# Altium PCB VirtualWire.PcbDoc
Units mm, origin at the board's own origin, x right, y up, seen from the top; angles counter-clockwise.
Board outline 100.6 x 100 mm, 4 copper layers (Top Layer, Int1 (GND), Int2 (Signal), Bottom Layer), stack 1.369 mm thick; 35 components, 65 nets, 299 pads, 84 vias.
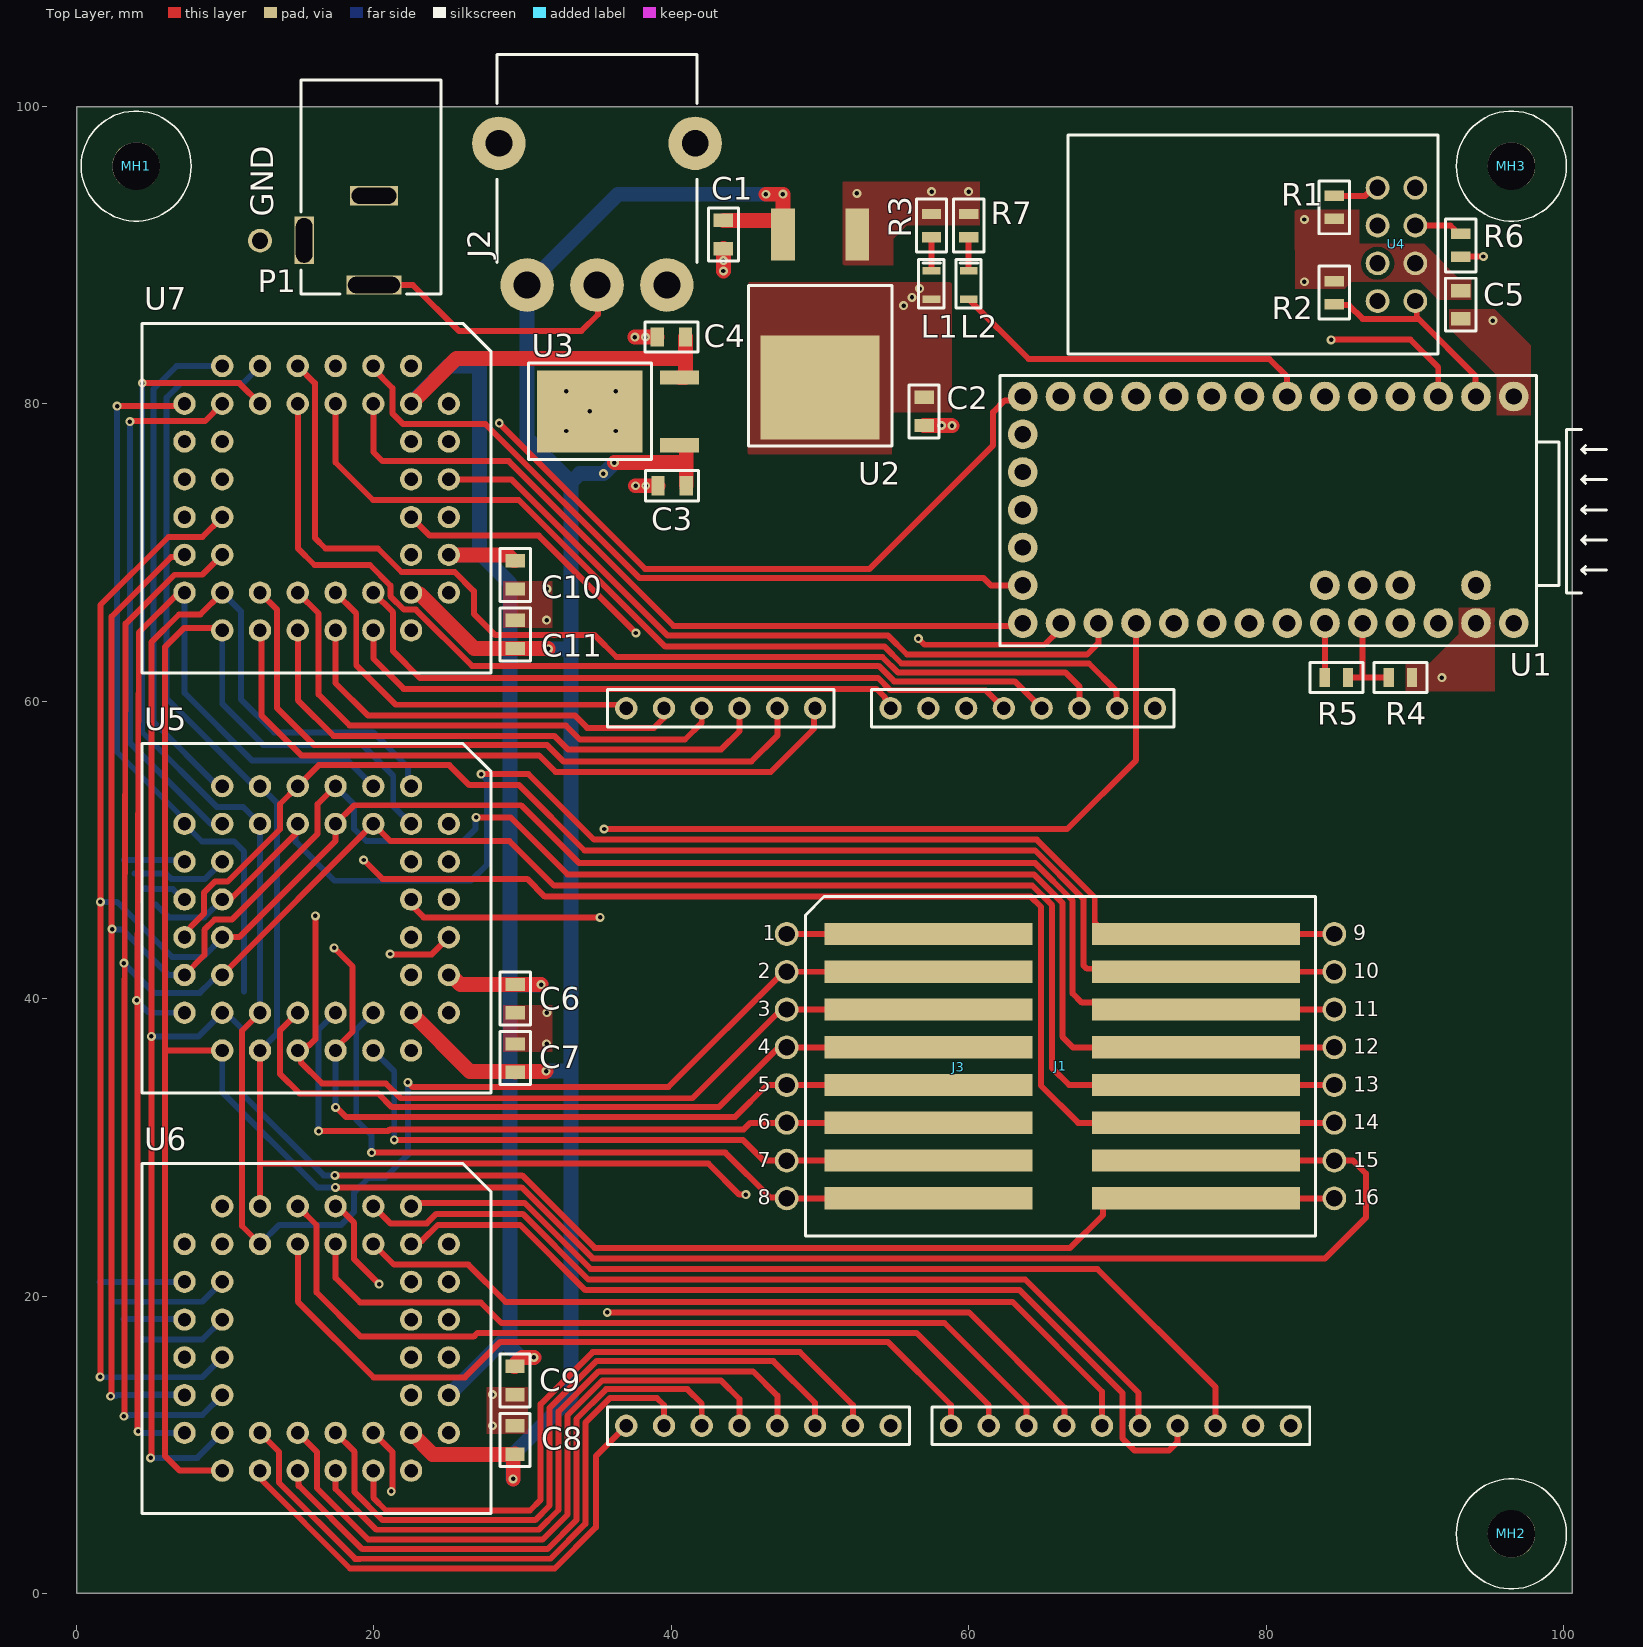
[diagram p0: Top Layer view]
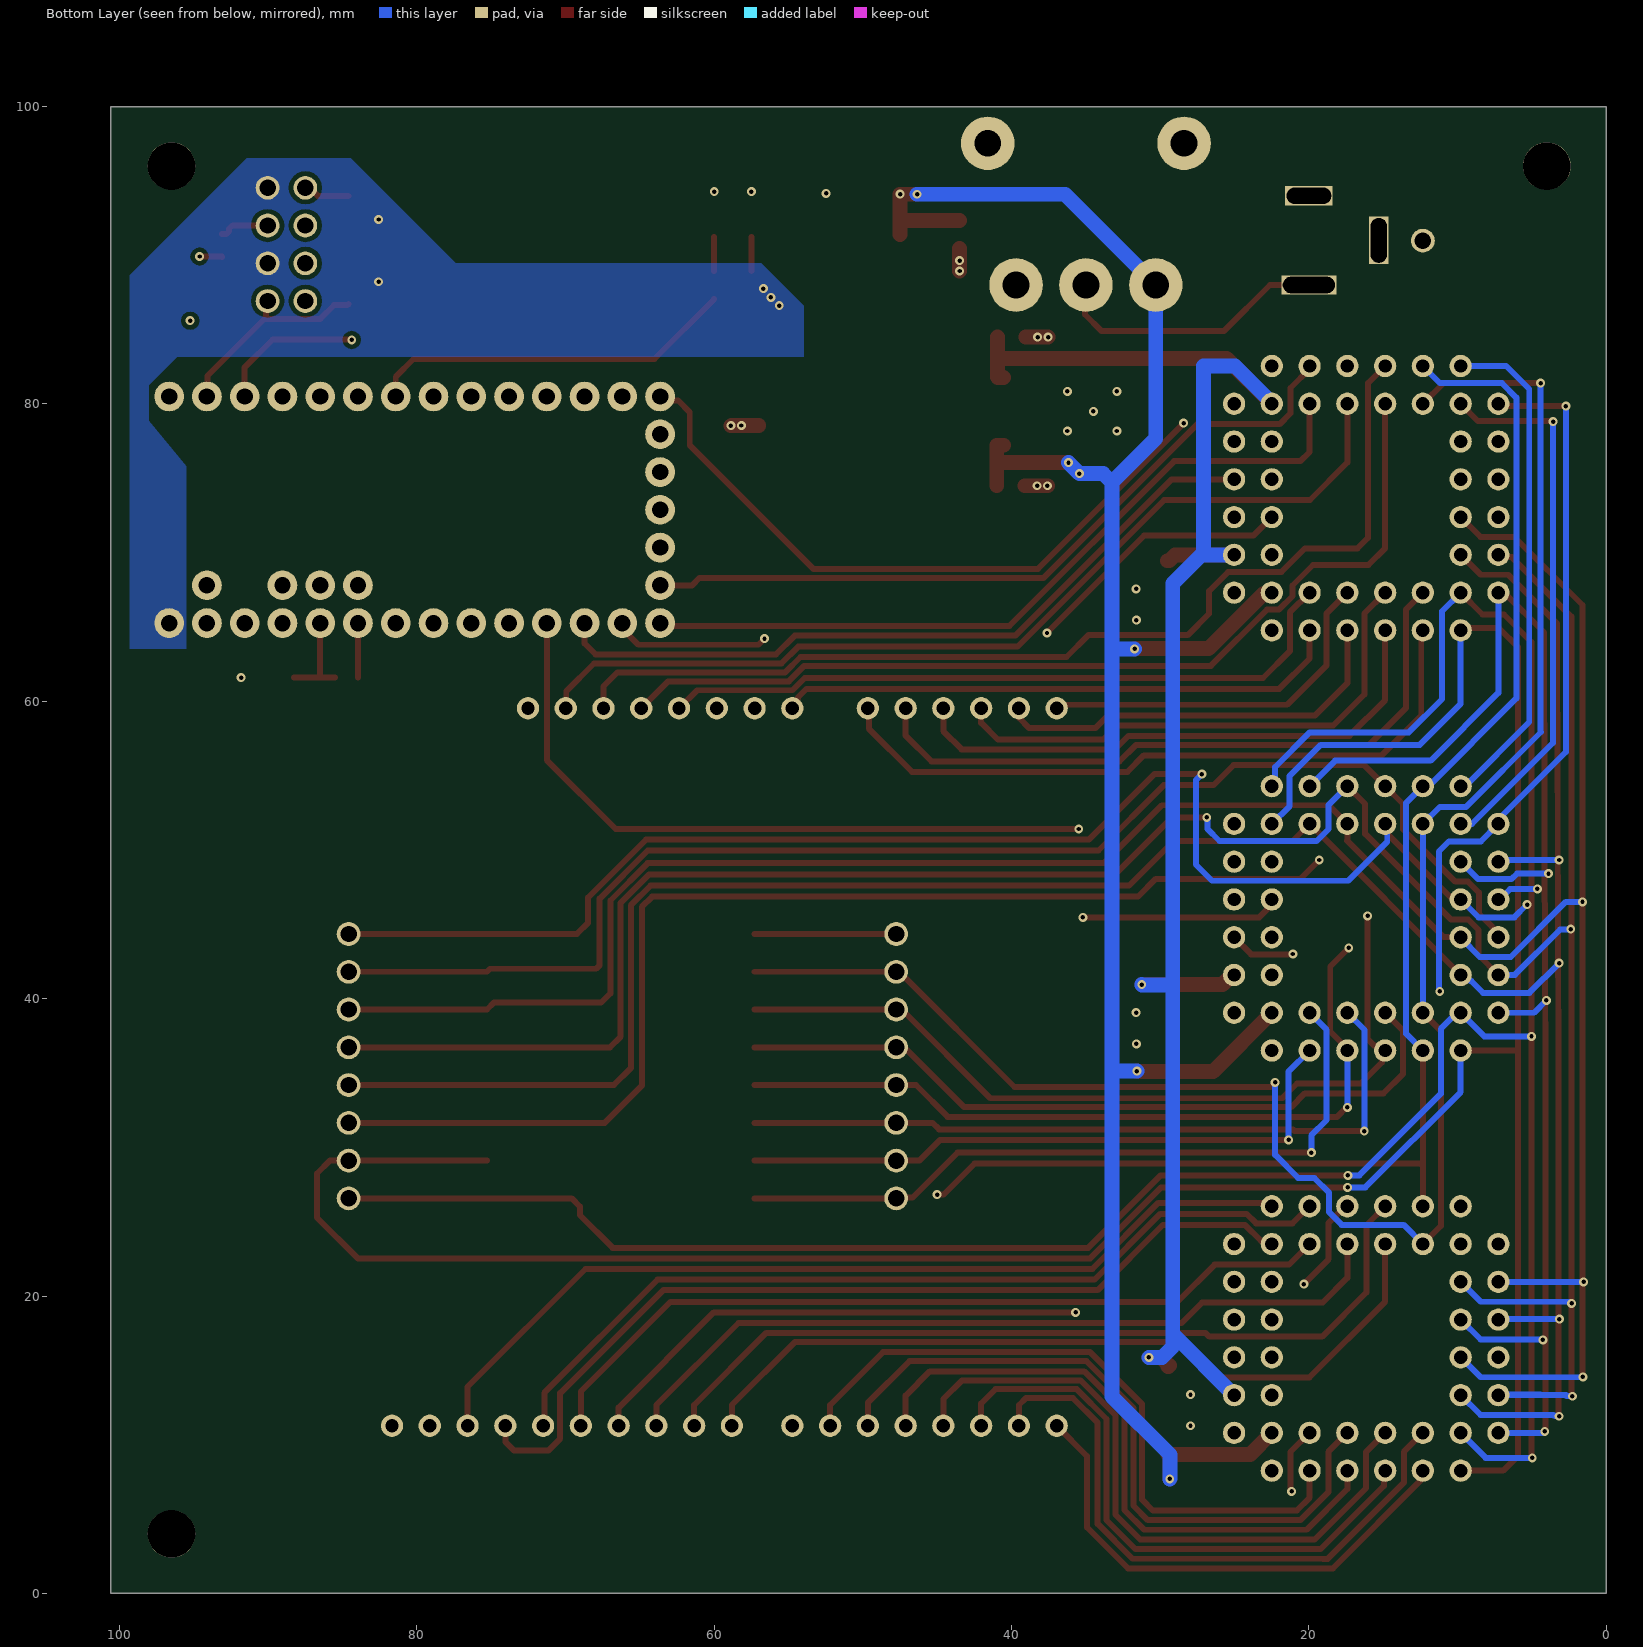
[diagram p1: Bottom Layer view, seen from below]
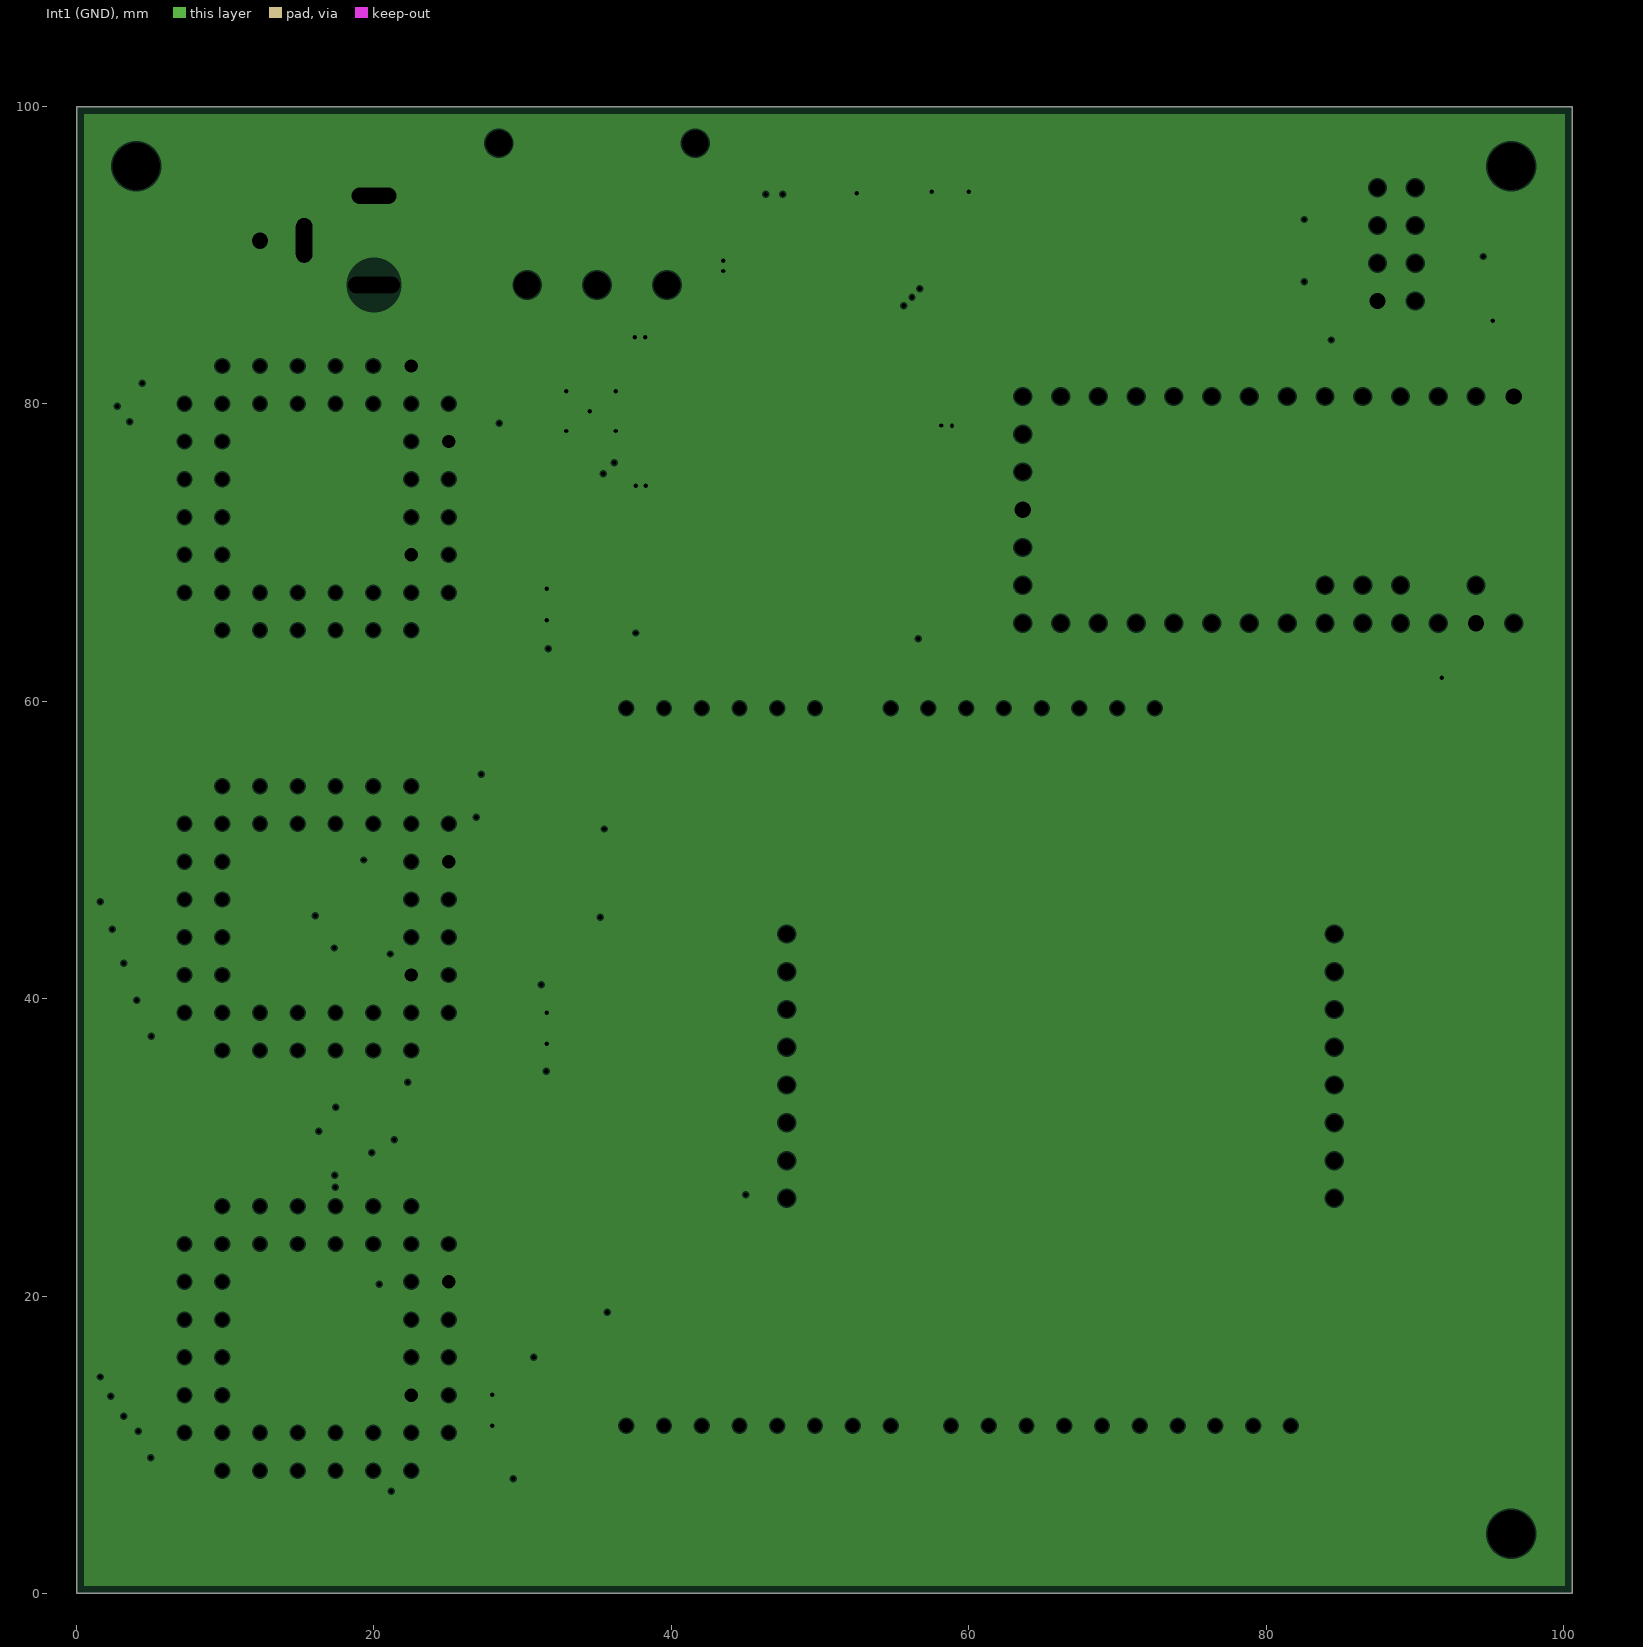
[diagram p2: Int1 (GND), clearances drawn from the general rule]
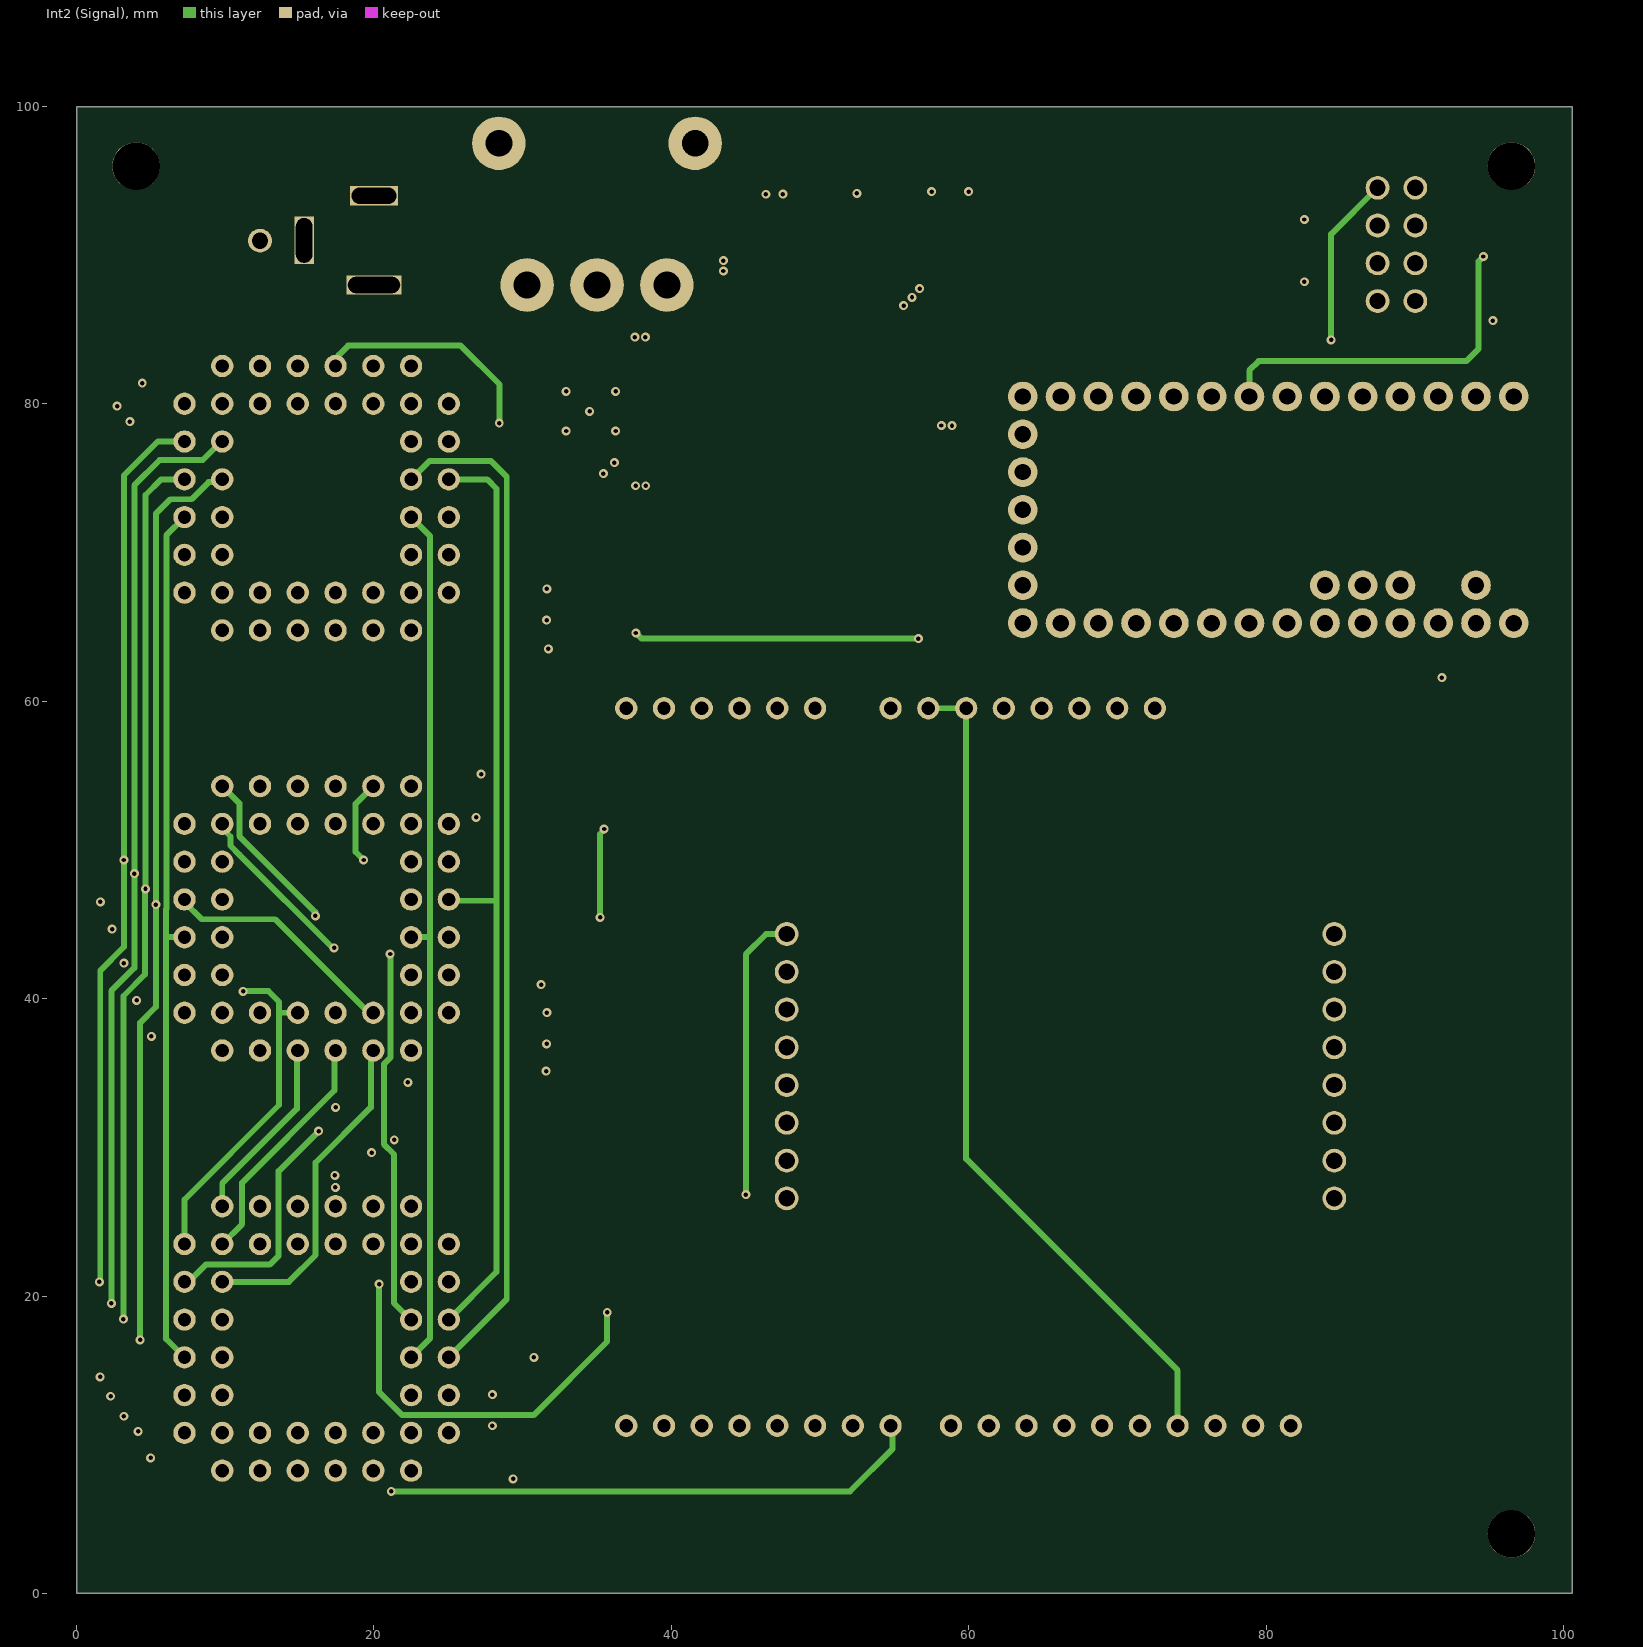
[diagram p3: Int2 (Signal)]
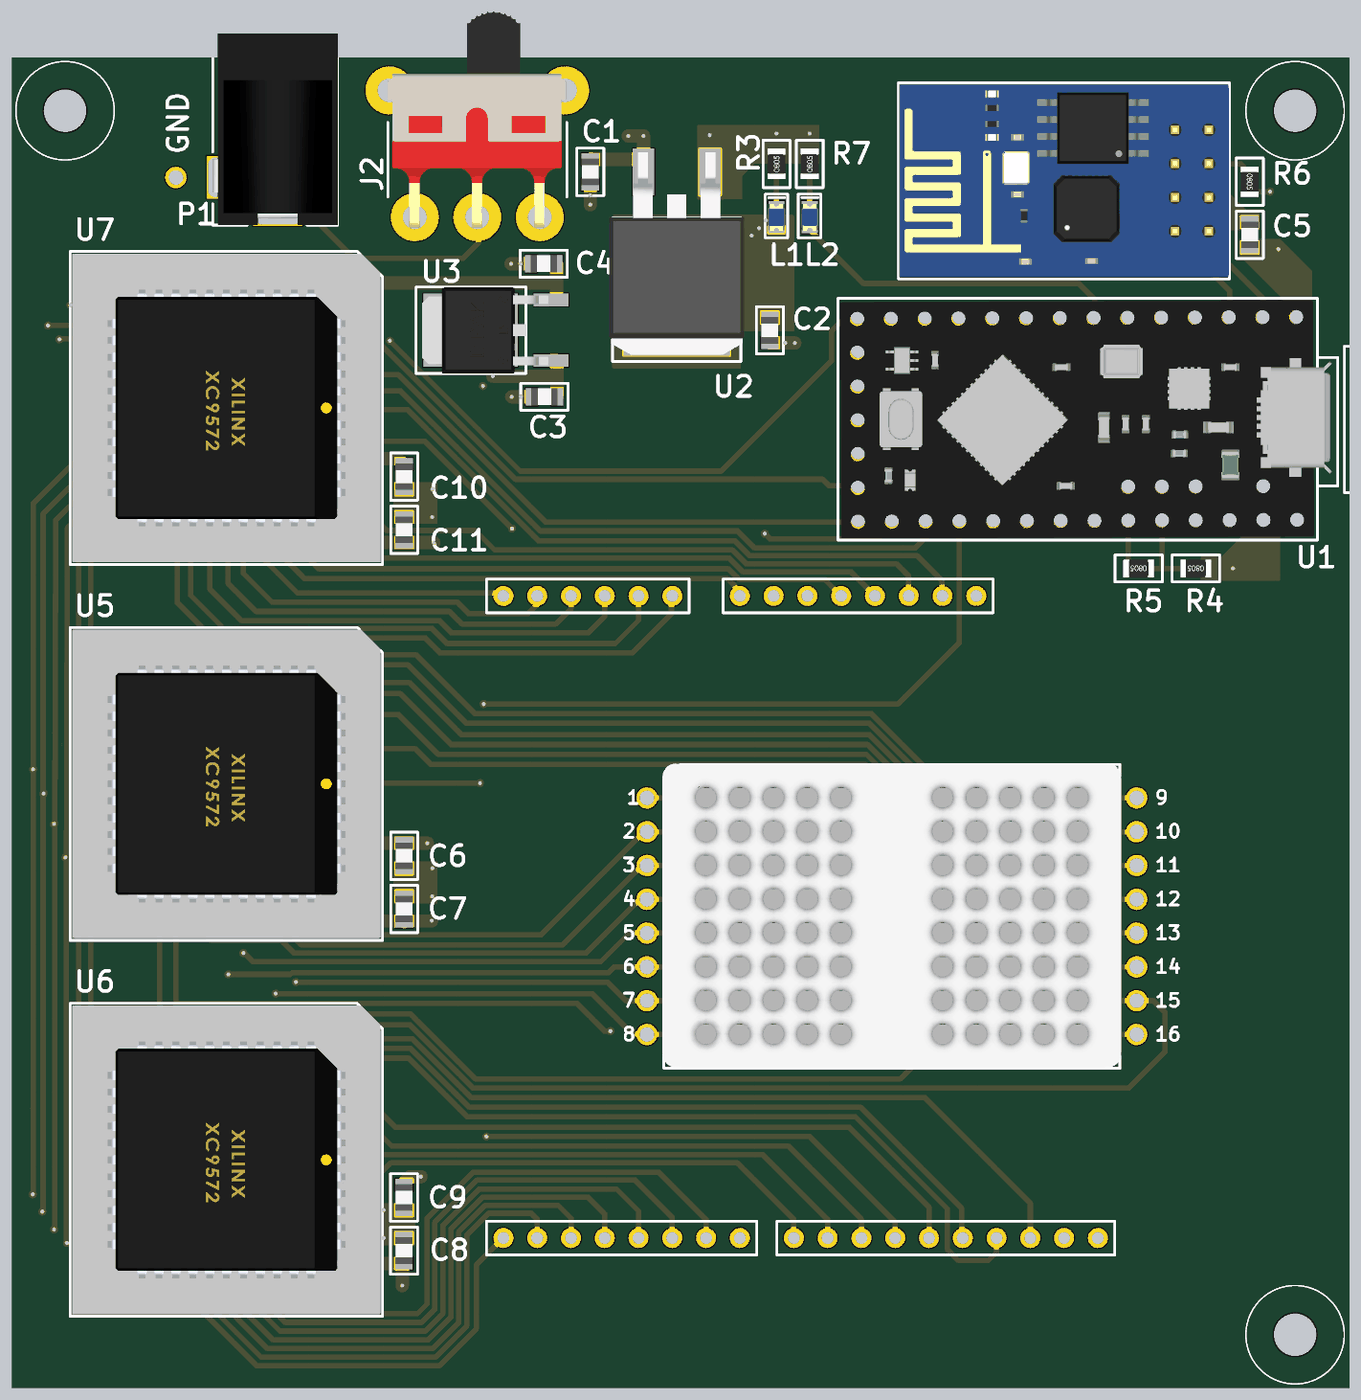
[diagram p4: 3D render of the assembled board from above, using the file's embedded part models]

## Layer stack, top to bottom
Top Solder: solder mask 0.0254, SM-001, Dk 4
Top Layer: signal copper 0.035
Dielectric 1: prepreg 0.1295, PP-017, Dk 4.3
Dielectric 2: prepreg 0.1295, PP-017, Dk 4.3
Int1 (GND): plane copper 0.035, net GND
Dielectric 3: core 0.7112, Core-039, Dk 4.8
Int2 (Signal): signal copper 0.035
Dielectric 4: prepreg 0.1295, PP-017, Dk 4.3
Dielectric 5: prepreg 0.1295, PP-017, Dk 4.3
Bottom Layer: signal copper 0.035
Bottom Solder: solder mask 0.0254, SM-001, Dk 4

## Board outline
0,0 100.6,0 100.6,100 0,100

## Design rules (kind name [scope] priority, off if disabled: settings)
Clearance "Around polygon" [IsRegion] p1: gap=0.3 ignorepadtopadclearanceinfootprint=FALSE
Clearance [All] p2: gap=0.2 ignorepadtopadclearanceinfootprint=FALSE
ComponentClearance J3_R4/5 [InComponent('J3') vs InComponent('R4') OR InComponent('R5')] p1: gap=0 collisioncheckmode=3 verticalgap=0 showdistances=FALSE
ComponentClearance J1_J3 [InComponent('J1') vs InComponent('J3')] p2: gap=0 collisioncheckmode=3 verticalgap=0 showdistances=FALSE
ComponentClearance [All] p3: gap=0.2 collisioncheckmode=3 verticalgap=0.2 showdistances=FALSE
HoleSize [All] p1: absolutevalues=TRUE maxlimit=3.5 minlimit=0.2 maxpercent=80.000 minpercent=20.000
HoleToHoleClearance [All] p1: gap=0.305 allowstackedmicrovias=TRUE
MinimumSolderMaskSliver [All] p1: minsoldermaskwidth=0.33
PlaneClearance [All] p1: clearance=0.1
PlaneConnect [All] p1: planeconnectstyle=Direct reliefexpansion=0.508 reliefentries=4 reliefconductorwidth=0.254 reliefairgap=0.254
PolygonConnect [All] p1: connectstyle=Direct reliefconductorwidth=0.254 reliefentries=4 polygonreliefangle="90 Angle" airgapwidth=0.254
RoutingVias [All] p1: holewidth=0.3 width=0.6 viastyle="Through Hole" minholewidth=0.3 minwidth=0.6 maxholewidth=0.3 maxwidth=0.6
SilkToSilkClearance [All] p1: silktosilkclearance=0.1
SilkToSolderMaskClearance [IsPad] p1: minsilkscreentomaskgap=0.1 clearancetoexposedcopper=TRUE
SolderMaskExpansion [All] p1: expansion=0.1
Width Width_POWER [InNet ('+*') or InNet('GND')] p1: maxlimit=2 minlimit=0.4 preferedwidth=1
Width [All] p2: maxlimit=0.5 minlimit=0.3 preferedwidth=0.4
22 further rules are at their usual default settings.

## Components (designator, comment, footprint, x,y, rotation, side; value= is the part's Value field where it differs from the comment)
C1 "10u" C0805 43.5,91.4 r90 top
C2 "10u" C0805 57,79.5 r90 top
C3 "330n" C0805 40.05,74.5 r0 top
C4 "100n" C0805 40,84.5 r0 top
C5 "10n" C0805 93.091,86.675 r90 top
C6 "100n" C0805 29.5,40 r90 top
C7 "100n" C0805 29.5,36 r270 top
C8 "100n" C0805 29.489,14.315 r90 top
C9 "100n" C0805 29.489,10.315 r270 top
C10 "100n" C0805 29.5,68.5 r90 top
C11 "100n" C0805 29.5,64.5 r270 top
GND "EPAD" EPAD 12.335,90.98 r0 top (schematic designator J4)
J1 "MINI_BREADBOARD" MINI_BREADBOARD 66.175,35.458 r0 top locked
J2 "500SSP1S1M6QEA" "SLIDE SPDT" 30.3,88 r0 top
J3 "UNO_SHEILD" ARDUINO_UNO_SHIELD 36.965,11.271 r180 top locked
L1 "LED0805" LED0805 57.5,88 r270 top
L2 "LED0805" LED0805 60,88 r270 top
MH1 "MH 3.2mm NP" MH3.2mm 4,96 r0 top
MH2 "MH 3.2mm NP" MH3.2mm 96.5,4 r0 top
MH3 "MH 3.2mm NP" MH3.2mm 96.5,96 r0 top
P1 "PJ-002A" PJ-002A 20,88 r90 top
R1 "10k" R0805 84.59,93.225 r270 top
R2 "10k" R0805 84.59,87.49 r90 top
R3 "160" R0805 57.5,92 r90 top
R4 "ID" R0805 89.04,61.595 r180 top
R5 "10k" R0805 84.735,61.595 r180 top
R6 "10k" R0805 93.091,90.665 r270 top
R7 "160" R0805 60,92 r90 top
U1 "TEENSY-LC" TEENSY-LC 96.66,80.5 r270 top locked
U2 "LD1085D2T33R" D2PAK 50,83 r270 top
U3 "L7805CDT-TR" DPAK 36.4,79.5 r180 top
U4 "WRL-13678" ESP8266 90.04,86.92 r180 top locked
U5 "AD75019JPZ" PLCC44_DIP 16.145,45.402 r270 top
U6 "AD75019JPZ" PLCC44_DIP 16.145,17.145 r270 top locked
U7 "AD75019JPZ" PLCC44_DIP 16.145,73.66 r270 top

## Footprints (in the part's own frame and the unit in brackets; to place one, negate y for a bottom-side part, rotate by r counter-clockwise, add the part's x,y. Pads: shape width x height; smd on the part's side, far side on the other; paste and mask are expansions set on the pad)
ARDUINO_UNO_SHIELD [mm]
  round 1.5 hole 0.9: 1(0,0) 2(-2.54,0) 3(-5.08,0) 4(-7.62,0) 5(-10.16,0) 6(-12.7,0) 7(-15.24,0) 8(-17.78,0) 9(-21.844,0) 10(-24.384,0) 11(-26.924,0) 12(-29.464,0) 13(-32.004,0) 14(-34.544,0) 15(-37.084,0) 16(-39.624,0) 17(0,-48.26) 18(-2.54,-48.26) 19(-5.08,-48.26) 20(-7.62,-48.26) 21(-10.16,-48.26) 22(-12.7,-48.26) 23(-17.78,-48.26) 24(-20.32,-48.26) 25(-22.86,-48.26) 26(-25.4,-48.26) 27(-27.94,-48.26) 28(-30.48,-48.26) 29(-33.02,-48.26) ""(-44.704,0) ""(-42.164,0) ""(-35.56,-48.26)
  silkscreen extent -45.97,-49.53 1.27,1.27
C0805 [mm]
  rect 0.9x1.3 smd: 1(-0.95,0) 2(0.95,0)
  silkscreen extent -1.78,-1.02 1.78,1.02, body extent -1,-0.66 1,0.66, height 0.74
D2PAK [mm]
  rect 3.5x1.6 smd: 1(-8.4,2.5) 3(-8.4,-2.5)
  rect 7x8 smd: 4(1.9,0)
  silkscreen extent -4.95,-4.83 5.84,4.83, body extent -9.92,-5.08 5.35,5.08, height 4.78
DPAK [mm] "D-PAK, 3-Pads, Body 6.10x6.56mm (max), IPC Medium Density"
  rect 2.6x0.95 smd: 1(-4.15,2.28) 3(-4.15,-2.28)
  rect 7.1x5.5 smd: 4(1.9,0)
  silkscreen extent -2.25,-3.25 6,3.25, body extent -3.94,-3.24 5.56,3.25, height 2.31
EPAD [mm]
  round 1.6 hole 1.1: 1(0,0)
ESP8266 [mm]
  round 1.6 hole 1.1: 1(0,0) 2(0,-2.54) 3(0,-5.08) 4(0,-7.62) 5(2.54,-7.62) 6(2.54,-5.08) 7(2.54,-2.54) 8(2.54,0)
  silkscreen extent -1.52,-11.18 23.37,3.56, body extent -1.47,-11.09 23.33,3.41, height 5.88
LED0805 [mm]
  rect 0.5x1.2 smd: 1(-0.95,0) 2(0.95,0)
  silkscreen extent -1.73,-0.86 1.55,0.84, body extent -1.01,-0.62 1.01,0.63, height 1.1
MH3.2mm [mm] "MHNP 3.2mm"
  round 3.2 hole 3.2 unplated: 1(0,0)
  silkscreen extent -3.7,-3.7 3.7,3.7
MINI_BREADBOARD [mm]
  round 1.6 hole 1.1: 1(-18.415,8.89) 2(-18.415,6.35) 3(-18.415,3.81) 4(-18.415,1.27) 5(-18.415,-1.27) 6(-18.415,-3.81) 7(-18.415,-6.35) 8(-18.415,-8.89) 9(18.415,8.89) 10(18.415,6.35) 11(18.415,3.81) 12(18.415,1.27) 13(18.415,-1.27) 14(18.415,-3.81) 15(18.415,-6.35) 16(18.415,-8.89)
  rect 14x1.5 smd: 1(-8.89,8.89) 2(-8.89,6.35) 3(-8.89,3.81) 4(-8.89,1.27) 5(-8.89,-1.27) 6(-8.89,-3.81) 7(-8.89,-6.35) 8(-8.89,-8.89) 9(9.11,8.89) 10(9.11,6.35) 11(9.11,3.81) 12(9.11,1.27) 13(9.11,-1.27) 14(9.11,-3.81) 15(9.11,-6.35) 16(9.11,-8.89)
  silkscreen extent -17.14,-11.43 17.14,11.4, body extent -17.25,-11.35 17.25,11.48, height 22.75
PJ-002A [mm] "CONN PWR JACK 2X5.5MM SOLDER"
  rect 1.3x3.7 hole 1.1 slot 3.5 at 90 deg: 1(0,0)
  rect 1.3x3.2 hole 1.1 slot 3 at 90 deg: 2(6,0)
  rect 3.2x1.3 hole 1.1 slot 3 at 0 deg: 3(3,4.7)
  silkscreen extent -0.6,-4.5 13.8,4.9, body extent -0.6,-4.5 13.8,4.9, height 11.05
PLCC44_DIP [mm]
  round 1.5 hole 0.9: 1(1.27,6.35) 2(-1.27,8.89) 3(-1.27,6.35) 4(-3.81,8.89) 5(-3.81,6.35) 6(-6.35,8.89) 7(-8.89,6.35) 8(-6.35,6.35) 9(-8.89,3.81) 10(-6.35,3.81) 11(-8.89,1.27) 12(-6.35,1.27) 13(-8.89,-1.27) 14(-6.35,-1.27) 15(-8.89,-3.81) 16(-6.35,-3.81) 17(-8.89,-6.35) 18(-6.35,-8.89) 19(-6.35,-6.35) 20(-3.81,-8.89) 21(-3.81,-6.35) 22(-1.27,-8.89) 23(-1.27,-6.35) 24(1.27,-8.89) 25(1.27,-6.35) 26(3.81,-8.89) 27(3.81,-6.35) 28(6.35,-8.89) 29(8.89,-6.35) 30(6.35,-6.35) 31(8.89,-3.81) 32(6.35,-3.81) 33(8.89,-1.27) 34(6.35,-1.27) 35(8.89,1.27) 36(6.35,1.27) 37(8.89,3.81) 38(6.35,3.81) 39(8.89,6.35) 40(6.35,8.89) 41(6.35,6.35) 42(3.81,8.89) 43(3.81,6.35) 44(1.27,8.89)
  silkscreen extent -11.76,-11.76 11.76,11.73, body extent -11.59,-11.59 11.59,11.59, height 9
R0805 [mm]
  rect 0.7x1.3 smd mask+0.02: 1(-0.775,0) 2(0.775,0)
  silkscreen extent -1.78,-1.02 1.78,1.02, body extent -1.15,-0.67 1.15,0.68, height 0.77
"SLIDE SPDT" [mm] "500SSP1S1M6QEA"
  round 3.6 hole 1.8: 1(0,0) 2(4.7,0) 3(9.4,0) ""(-1.9,9.53) ""(11.3,9.53)
  silkscreen extent -2.03,1.52 11.43,15.49, body extent -2.03,-0.75 11.38,15.49, height 6.6
TEENSY-LC [mm]
  round 2 hole 1.1: 1(0,0) 2(0,-2.54) 3(0,-5.08) 4(0,-7.62) 5(0,-10.16) 6(0,-12.7) 7(0,-15.24) 8(0,-17.78) 9(0,-20.32) 10(0,-22.86) 11(0,-25.4) 12(0,-27.94) 13(0,-30.48) 14(0,-33.02) 15(2.54,-33.02) 16(5.08,-33.02) 17(7.62,-33.02) 18(10.16,-33.02) 19(12.7,-33.02) 20(15.24,-33.02) 21(15.24,-30.48) 22(15.24,-27.94) 23(15.24,-25.4) 24(15.24,-22.86) 25(15.24,-20.32) 26(15.24,-17.78) 27(15.24,-15.24) 28(15.24,-12.7) 29(15.24,-10.16) 30(15.24,-7.62) 31(15.24,-5.08) 32(15.24,-2.54) 33(15.24,0) 34(12.7,-2.54) 35(12.7,-7.62) 36(12.7,-10.16) 37(12.7,-12.7)
  silkscreen extent -1.4,-34.54 16.76,6.22, body extent -1.27,-34.36 16.66,2.61, height 4.49

## Part data
C1 C2: library part C805_10u, "10uF"
C3: library part C805_330n, "330nF"
C4 C6 C7 C8 C9 C10 C11: library part C805_100n, "100nF"
C5: library part C805_10n, "10nF"
GND: "Exposed PAD"
J1: "Mini Breadboard 16x2"
J2: library part "SLIDE SPDT", "SWITCH SLIDE SPDT 5A 120V", Contact Current Rating=5A, Contact Resistance=10mR, Flammability Rating="UL94 V-0", Manufacturer=E-Switch, Max Operating Temperature=85°C, Max Voltage Rating (AC)=250V, Max Voltage Rating (DC)=28V, Min Operating Temperature=-30°C, Package Quantity=1, Supplier Part Number 1=EG2478-ND, Voltage Rating (AC)=120V, Actuator Length=4.72mm, Actuator Material=Nylon,Polyamide, ComponentLink1Description=https://datasheet.ciiva.com/16337/500-16337624.pdf, ComponentLink1URL=https://datasheet.ciiva.com/16337/500-16337624.pdf, ComponentLink2Description=https://datasheet.ciiva.com/16174/35500-16174234.pdf, ComponentLink2URL=https://datasheet.ciiva.com/16174/35500-16174234.pdf, ComponentLink3Description=https://datasheet.ciiva.com/2889/t511006d-2889419.pdf, ComponentLink3URL=https://datasheet.ciiva.com/2889/t511006d-2889419.pdf, Contact Material="Copper,Silver,Copper Alloy", Contact Plating=Silver, Current Rating=5A, Electrical Life=30000Cycles, Housing Material="Stainless Steel", Lead Free="Lead Free", Manufacturer Part Number=500SSP1S1M6QEA, Mechanical Life=30000Cycles, Mount="Through Hole,Brackets", Orientation="Right Angle", Packaging=Bulk, Pricing 1="1=2.93, 10=2.808, 25=2.7484, 50=2.39, 100=2.3303, 250=2.27052, 500=1.912, 1000=1.7925, 5000=1.64313 (USD)", REACH SVHC=Unknown, Stock 1=6111, Supplier 1=Digi-Key, Switch Function=On-On, Switch Travel=2.16mm, Termination="PC Pin", Throw Configuration=SPDT, Voltage Rating (DC)=28V
J3: library part ARDUINO_UNO_SHIELD
L1 L2: "LED0805 any color"
MH1 MH2 MH3: library part MHNP, "Mounting hole 3.2mm non plated"
P1: "PJ-002 Series 2 x 6.5 mm 16 V Right Angle Through Hole Power Jack", Colour=Black, Current Rating=2.5A, Flammability Rating="UL94 V-0", Insulation Resistance=50MR, Manufacturer=CUI, Max Operating Temperature=85°C, Min Operating Temperature=-25°C, Package Quantity=500, Supplier Part Number 1=CP-002A-ND, Voltage Rating=24V, ComponentLink1Description=http://www.cui.com/product/resource/digikeypdf/pj-002a.pdf, ComponentLink1URL=http://www.cui.com/product/resource/digikeypdf/pj-002a.pdf, ComponentLink2Description=http://www.cui.com/Product/Resource/FuturePDF/PJ-002A.pdf, ComponentLink2URL=http://www.cui.com/Product/Resource/FuturePDF/PJ-002A.pdf, ComponentLink3Description=http://www.mouser.com/ds/2/670/pj-002a-515880.pdf, ComponentLink3URL=http://www.mouser.com/ds/2/670/pj-002a-515880.pdf, Connector Type=Jack, Contact Gender=Male, Contact Material="Copper,Copper Alloy", Contact Plating=Nickel,Tin, Diameter=2.1mm, Gender=Male, Housing Colour=Black, Housing Material=Thermoplastic, Lead Free="Lead Free", Manufacturer Part Number=PJ-002A, Mount="Through Hole", Number of Conductors=2, Orientation=Horizontal, Packaging=Bulk, Shielding=Unshielded, Stock 1=133077, Supplier 1=Digi-Key, Termination="Through Hole"
R1 R2 R4 R5 R6: library part R0805_10k
R3 R7: library part R0805_160, "160 Ohm"
U1: "DEV TEENSY LC 13305", Manufacturer=SparkFun, Manufacturer Part Number=DEV-13305, Supplier Part Number 1=1568-1233-ND, Pricing 1="1 = 14.38000 (USD)", Stock 1=1201, Supplier 1=Digi-Key
U2: "Fixed LDO Voltage Regulator, 6.3V to 30V, 1.3V Dropout, 3.3Vout, 3Aout, TO-263-3", Case/Package=TO-263, Dropout Voltage=1.3V, Input Bias Current=5mA, Manufacturer=STMicroelectronics, Max Input Voltage=30V, Max Operating Temperature=125°C, Max Output Current=3A, Max Output Voltage=3.333V, Min Input Voltage=6.3V, Min Operating Temperature=-40°C, Min Output Voltage=3.3V, Min Supply Voltage=4.9V, Output Voltage Accuracy=1%, Package Quantity=1, Quiescent Current=10mA, Supplier Part Number 1=497-1222-6-ND, Accuracy=1%, ComponentLink1Description=https://datasheet.ciiva.com/16375/cd00001883-16375381.pdf, ComponentLink1URL=https://datasheet.ciiva.com/16375/cd00001883-16375381.pdf, ComponentLink2Description=https://datasheet.ciiva.com/1511/1761309-1511542.pdf, ComponentLink2URL=https://datasheet.ciiva.com/1511/1761309-1511542.pdf, ComponentLink3Description=https://datasheet.ciiva.com/22694/1761309-22694841.pdf, ComponentLink3URL=https://datasheet.ciiva.com/22694/1761309-22694841.pdf, ComponentLink4Description=https://datasheet.ciiva.com/2044/cd00001883-2044187.pdf, ComponentLink4URL=https://datasheet.ciiva.com/2044/cd00001883-2044187.pdf, ComponentLink5Description=https://datasheet.ciiva.com/15111/getdatasheetpartid-65476-15111291.pdf, ComponentLink5URL=https://datasheet.ciiva.com/15111/getdatasheetpartid-65476-15111291.pdf, ComponentLink6Description=https://datasheet.ciiva.com/2044/cd00001883-2044188.pdf, ComponentLink6URL=https://datasheet.ciiva.com/2044/cd00001883-2044188.pdf, ComponentLink7Description=https://datasheet.ciiva.com/2044/cd00001883-2044189.pdf, ComponentLink7URL=https://datasheet.ciiva.com/2044/cd00001883-2044189.pdf, ComponentLink8Description=https://datasheet.ciiva.com/41439/001184676-da-01-en-ic-reg-ldo-3-3-ld1085d2t33r-to-263-3-stm-41439834.pdf, ComponentLink8URL=https://datasheet.ciiva.com/41439/001184676-da-01-en-ic-reg-ldo-3-3-ld1085d2t33r-to-263-3-stm-41439834.pdf, Contact Plating=Tin,Matte, Height=4.6mm, Lead Free="Lead Free", Length=10.4mm, Manufacturer Part Number=LD1085D2T33R, Max Supply Voltage=30V, Mount="Surface Mount", Nominal Output Voltage=3.3V, Number of Outputs=1, Number of Pins=3, Number of Regulators=1, Output Current=3A, Output Voltage=3.3V, Packaging="Tape and Reel", Polarity=Positive, Pricing 1="1=1.46, 10=1.305, 100=1.0176, 500=0.84066 (USD)", Radiation Hardening=No, REACH SVHC="No SVHC", Stock 1=5416, Supplier 1=Digi-Key, Termination=SMD/SMT, Weight=0.01lb, Width=9.35mm
U3: "IC REG LDO 5V 1.5A DPAK", Case/Package=TO-252, Dropout Voltage=2V, Manufacturer=STMicroelectronics, Max Input Voltage=35V, Max Operating Temperature=125°C, Max Output Current=1.5A, Min Input Voltage=7V, Min Operating Temperature=0°C, Min Output Voltage=5V, Package Quantity=1, Power Supply Rejection Ratio (PSRR)=62dB, Quiescent Current=8mA, Supplier Part Number 1=497-7255-2-ND, ComponentLink1Description=https://datasheet.ciiva.com/2042/cd00000444-2042784.pdf, ComponentLink1URL=https://datasheet.ciiva.com/2042/cd00000444-2042784.pdf, ComponentLink2Description=https://datasheet.ciiva.com/2042/cd00000444-2042785.pdf, ComponentLink2URL=https://datasheet.ciiva.com/2042/cd00000444-2042785.pdf, ComponentLink3Description=https://datasheet.ciiva.com/16357/cd00000444-16357893.pdf, ComponentLink3URL=https://datasheet.ciiva.com/16357/cd00000444-16357893.pdf, ComponentLink4Description=https://datasheet.ciiva.com/4882/cd00000444-4882231.pdf, ComponentLink4URL=https://datasheet.ciiva.com/4882/cd00000444-4882231.pdf, ComponentLink5Description=https://datasheet.ciiva.com/17360/cd00000444-17360220.pdf, ComponentLink5URL=https://datasheet.ciiva.com/17360/cd00000444-17360220.pdf, ComponentLink6Description=https://datasheet.ciiva.com/2042/cd00000444-2042783.pdf, ComponentLink6URL=https://datasheet.ciiva.com/2042/cd00000444-2042783.pdf, ComponentLink7Description=https://datasheet.ciiva.com/26904/l7805cdt-tr-26904768.pdf, ComponentLink7URL=https://datasheet.ciiva.com/26904/l7805cdt-tr-26904768.pdf, Contact Plating=Tin,Matte, Height=2.4mm, Lead Free="Lead Free", Length=6.6mm, Manufacturer Part Number=L7805CDT-TR, Mount="Surface Mount", Number of Outputs=1, Number of Pins=3, Number of Regulators=1, Output Current=1.5A, Output Voltage=5V, Packaging="Tape and Reel", Polarity=Positive, Radiation Hardening=No, Stock 1=7500, Supplier 1=Digi-Key, Width=6.2mm
U4: library part ESP8266, "WIFI ESP8266 MOD WIFI TRACE ANT", Manufacturer=SparkFun, Supplier Part Number 1=1568-1235-ND, ComponentLink1Description=https://nurdspace.nl/images/e/e0/ESP8266_Specifications_English.pdf, ComponentLink1URL=https://nurdspace.nl/images/e/e0/ESP8266_Specifications_English.pdf, Manufacturer Part Number=WRL-13678, Pricing 1="1=6.95 (USD)", Stock 1=1618, Supplier 1=Digi-Key
U5 U6 U7: "SWITCH CROSSPOINT 16X16, SMD, 75019", Digital IC Case=LCC, Manufacturer="Analog Devices", Operating Temperature Max=85°C, Operating Temperature Min=-25°C, Supplier Part Number 1=AD75019JPZ-ND, Supply Voltage Max=5.5V, Supply Voltage Min=4.5V, ComponentLink1Description=https://datasheet.ciiva.com/3036/ad75019-3036466.pdf, ComponentLink1URL=https://datasheet.ciiva.com/3036/ad75019-3036466.pdf, ComponentLink2Description=https://datasheet.ciiva.com/1170/66420-1170438.pdf, ComponentLink2URL=https://datasheet.ciiva.com/1170/66420-1170438.pdf, ComponentLink3Description=https://datasheet.ciiva.com/26824/ad75019jpz-26824058.pdf, ComponentLink3URL=https://datasheet.ciiva.com/26824/ad75019jpz-26824058.pdf, Control Interface=Serial, Crosspoint Switch Type=Analogue, Input / Output Configuration=-, Manufacturer Part Number=AD75019JPZ, MSL="MSL 3 - 168 hours", No. of Pins=44Pins, Packaging=Each, Product Range=-, Stock 1=792, Supplier 1=Digi-Key, SVHC="No SVHC (17-Dec-2015)"

## Via types
v1: diameter 0.6, hole 0.3, Top Layer to Bottom Layer, tented both sides, 68 vias
v2: diameter 0.6, hole 0.3, Int2 (Signal) to Bottom Layer, tented both sides, 9 vias
v3: diameter 0.6/0.6/0.6 (per signal layer), hole 0.3, Top Layer to Bottom Layer, tented both sides, 7 vias

## Nets (pads, with @x,y where several pads share a name; then routed paths per layer and width w, separated by ;. In a path a pad name is that pad's centre, name@x,y a point inside that pad or via, vN(x,y) a via of type N, cw(c..) or ccw(c..) an arc to the next point about the centre after c; other vN are vias at no path point)
+3.3V: C2.2 C5.2 L1.2 R1.2 R2.2 U1.33 U2.4 U4.2 U4.4
  other v1: 55.626,86.614 56.185,87.173 56.693,87.757 82.575,88.22 82.575,92.405
+5: C4.2 C6.2 C8.2 C10.2 U3.3 U5.42 U6.42 U7.8 U7.42 | length 120.2
  Top Layer w1: U7.8 25.543,83.058 40.95,83.058 ; U5.42 25.17,41.593 25.813,40.95 C6.2 29.505,40.945 v1(31.242,40.945) ; U7.42 29,69.85 29.4,69.45 C10.2 ; C8.2 29.438,15.265 29.388,15.315 29.947,15.875 v1(30.759,15.875) ; U3.3 40.925,81.78 40.95,81.805 40.95,83.058 ; C4.2 40.95,83.058
  Bottom Layer w1: U7.8 22.495,80.077 24.96,82.542 27.102,82.542 27.102,69.977 27.229,69.85 ; U6.42 29.159,17.459 ; U7.42 27.229,69.85 ; v1(30.759,15.875) 29.87,15.875 29.159,16.586 29.159,17.459 ; v1(31.242,40.945) 31.217,40.919 29.159,40.919 ; 27.229,69.85 29.159,67.92 29.159,40.919 ; 29.159,17.459 29.159,40.919
+12: C1.2 C3.2 C7.2 C9.2 C11.2 J2.1 U2.3 U3.1 U5.41 U6.41 U7.41 | length 155.3
  Top Layer w1: U6.41 23.945,9.345 C9.2@29.392,9.345 ; U5.41 26.445,35.103 29.054,35.103 29.057,35.1 29.45,35.1 C7.2 29.55,35.1 29.943,35.1 29.946,35.103 31.547,35.103 v1(31.572,35.128) ; U7.41 22.591,67.214 23.08,67.214 26.744,63.55 C11.2 31.7,63.55 v1(31.725,63.525) ; v1(29.362,7.696) 29.362,9.315 C9.2@29.392,9.345 ; C9.2 29.469,9.345 C9.2@29.392,9.345 ; v1(36.172,76.05) 40.825,76.05 41,76.225 ; U3.1 40.975,77.22 41,77.195 41,76.225 ; C3.2 41,76.225 ; C1.2 47.2,92.35 U2.3@47.5,92.05 ; v1(46.355,94.105) 46.357,94.107 v1(47.498,94.107) 47.5,94.105 U2.3@47.5,92.05 ; U2.3 U2.3@47.5,92.05
  Bottom Layer w1: v1(29.362,7.696) 29.337,7.722 29.337,9.322 33.249,13.233 33.249,35.052 ; v1(31.572,35.128) 33.172,35.128 33.249,35.052 ; v1(31.725,63.525) 33.198,63.525 33.249,63.475 ; v1(36.172,76.05) v1(35.433,75.311) 33.833,75.311 33.249,74.727 ; v1@46.355,94.107 36.407,94.107 J2.1 30.3,77.675 33.249,74.727 ; 33.249,35.052 33.249,63.475 ; 33.249,63.475 33.249,74.727
A0: J3.22 U7.31 | length 47.1
  Top Layer w0.4: U7.31 12.446,64.659 12.446,59.03 15.113,56.363 31.099,56.363 32.217,55.245 46.685,55.245 49.598,58.158 49.598,59.465 J3.22
A1: J3.21 U7.32 | length 45.9
  Top Layer w0.4: U7.32 13.485,66.16 13.485,64.294 13.462,64.271 13.462,59.563 15.951,57.074 31.623,57.074 32.741,55.956 45.39,55.956 47.125,57.691 J3.21
A2: J3.20 U7.33 | length 37.8
  Top Layer w0.4: U7.33 14.875,60.08 17.282,57.674 32.134,57.674 33.039,56.769 43.358,56.769 44.585,57.996 J3.20
A3: J3.19 U7.34 | length 35.9
  Top Layer w0.4: U7.34 16.265,65.92 16.265,60.468 18.364,58.369 32.903,58.369 33.842,57.429 40.919,57.429 42.045,58.555 J3.19
A3.3V: J3.27 U7.14 | length 64.6
  Top Layer w0.4: U7.14 14.875,70.291 16.002,69.164 19.727,69.164 21.105,67.786 21.105,67.074 22.019,66.16 22.816,66.16 26.594,62.382 53.945,62.382 54.983,61.344 63.092,61.344 J3.27
A4: J3.18 U7.35 | length 27.8
  Top Layer w0.4: U7.35 17.415,61.223 19.583,59.055 33.503,59.055 34.341,58.217 38.837,58.217 39.505,58.885 J3.18
A5: J3.17 U7.36 | length 24.8
  Top Layer w0.4: U7.36 18.805,65.92 18.805,62.424 21.463,59.766 36.73,59.766 J3.17
A5V: J3.26 U7.38 | length 47.2
  Top Layer w0.4: U7.38 21.285,65.98 21.285,63.373 23.089,61.57 53.909,61.57 54.734,60.744 61.152,60.744 J3.26
ADC: U1.20 U7.10 | length 51.8
  Top Layer w0.4: U7.10 19.955,76.768 20.574,76.149 29.068,76.149 40.142,65.075 63.455,65.075 U1.20
AGND: J3.15 J3.24 J3.25 U6.8 | length 118.2
  Top Layer w0.4: U6.8 22.705,23.705 23.223,23.705 24.308,24.79 29.82,24.79 34.214,20.396 63.424,20.396 70.358,13.462 70.358,10.402 71.158,9.601 73.457,9.601 74.049,10.193 J3.15
  Int2 (Signal) w0.4: J3.24 J3.25 59.825,29.227 74.049,15.003 J3.15
AREF: J3.16 U6.7 | length 61.9
  Top Layer w0.4: U6.7 22.724,26.264 30.124,26.264 34.569,21.819 68.656,21.819 76.589,13.886 J3.16
ARESET: J3.28 U7.13 | length 70
  Top Layer w0.4: U7.13 16.025,81.4 16.025,70.995 16.739,70.282 20.269,70.282 21.851,68.7 25.432,68.7 26.721,67.412 26.721,65.888 28.158,64.45 34.839,64.45 36.306,62.982 54.193,62.982 55.231,61.944 66.503,61.944 67.445,61.003 J3.28
D0: J3.1 U6.31 | length 34.4
  Top Layer w0.4: U6.31 12.335,7.731 18.39,1.676 32.156,1.676 34.925,4.445 34.925,9.231 J3.1
D1: J3.2 U6.32 | length 42.2
  Top Layer w0.4: U6.32 13.614,9.516 13.614,7.442 18.736,2.321 19.05,2.321 ; 19.05,2.327 31.867,2.327 34.214,4.674 34.214,11.481 35.865,13.132 39.04,13.132 39.505,12.667 J3.2 J3.2@39.343,11.433
D2: J3.3 U6.33 | length 40.3
  Top Layer w0.4: U6.33 14.937,8.193 14.937,7.208 14.987,7.208 19.218,2.977 31.669,2.977 33.614,4.922 33.614,11.729 35.616,13.732 41.081,13.732 42.045,12.768 J3.3
D3: J3.4 U6.34 | length 44.8
  Top Layer w0.4: U6.34 16.154,9.516 16.154,7.087 19.614,3.627 31.344,3.627 33.014,5.298 33.014,11.978 35.368,14.332 43.326,14.332 44.585,13.073 J3.4
D4: J3.5 U6.35 | length 43.1
  Top Layer w0.4: U6.35 17.415,7.02 20.157,4.278 31.085,4.278 32.414,5.607 32.414,12.226 35.123,14.935 45.491,14.935 47.125,13.302 J3.5
D5: J3.6 U6.36 | length 47.3
  Top Layer w0.4: U6.36 18.694,9.516 18.694,6.807 20.574,4.928 30.836,4.928 31.814,5.906 31.814,12.475 34.96,15.621 46.863,15.621 49.665,12.819 J3.6
D6: J3.7 U6.37 | length 45.5
  Top Layer w0.4: U6.37 19.955,6.436 20.812,5.578 30.496,5.578 31.214,6.296 31.214,12.723 34.711,16.221 48.651,16.221 52.205,12.667 J3.7
D7: J3.8 U6.38 | length 41.1
  Top Layer w0.4: U6.38 21.234,9.516 21.234,6.883 21.26,6.858 v1(21.158,6.858)
  Int2 (Signal) w0.4: v1(21.158,6.858) 52.019,6.858 54.889,9.728 54.889,11.127 J3.8
D8: J3.9 U6.14 | length 54.2
  Top Layer w0.4: U6.14 15.045,23.325 14.875,23.155 14.875,19.618 19.964,14.529 26.111,14.529 28.499,16.916 54.559,16.916 58.809,12.667 J3.9
D9: J3.10 U6.13 | length 56.3
  Top Layer w0.4: U6.13 16.129,24.781 16.129,20.244 19.108,17.265 26.702,17.265 26.963,17.526 56.49,17.526 61.349,12.667 J3.10
D10: J3.11 U6.12 | length 53.7
  Top Layer w0.4: U6.12 17.415,21.218 19.068,19.565 27.186,19.565 28.565,18.186 58.369,18.186 63.889,12.667 J3.11
D11: J3.12 U6.11 | length 68.6
  Top Layer w0.4: U6.11@17.415,26.203 U6.11 17.551,26.035 18.669,24.917 18.669,22.479 v1(20.345,20.803) ; v1(35.687,18.898) 60.02,18.898 66.429,12.489 J3.12
  Int2 (Signal) w0.4: v1(20.345,20.803) 20.345,13.538 21.895,11.989 30.734,11.989 35.687,16.942 v1(35.687,18.898) ; J3.12 J3.12@66.446,11.289
D12: J3.13 U6.10 | length 55.4
  Top Layer w0.4: U6.10 21.345,22.105 26.343,22.105 28.851,19.598 62.952,19.598 68.969,13.581 J3.13
D13: J3.14 U6.9 | length 59.5
  Top Layer w0.4: U6.9 21.105,24.885 23.554,24.885 24.196,25.527 29.997,25.527 34.417,21.107 63.805,21.107 71.425,13.487 71.425,11.355 J3.14
DAC: U1.14 U7.11 | length 61
  Top Layer w0.4: v1(28.423,78.711) 38.224,68.91 53.336,68.91 61.646,77.22 61.646,79.451 62.436,80.241 63.381,80.241 U1.14
  Int2 (Signal) w0.4: U7.11 17.625,82.76 17.625,83.284 18.263,83.922 25.832,83.922 28.448,81.305 28.448,78.737 v1(28.423,78.711)
GND: C1.1 C2.1 C3.1 C4.1 C5.1 C6.1 C7.1 C8.1 C9.1 C10.1 C11.1 GND.1 P1.2 P1.3 R3.2 R4.1 R7.2 U1.1 U1.17 U1.32 U2.1 U3.4 U4.8 U5.4 U5.43 U6.4 U6.43 U7.4 U7.7 U7.43 | length 6.4
  Top Layer w1: v1(37.542,84.5) C4.1 ; v1(37.592,74.5) C3.1 ; v1(43.5,88.942) C1.1 ; C2.1 58.839,78.55 58.852,78.537 v1(58.877,78.537)
  other v1: 27.965,11.271 27.965,13.371 31.609,36.956 31.623,39.064 31.609,65.456 31.623,67.564 38.278,74.5 58.166,78.55 38.252,84.5 43.5,89.637 52.476,94.167 57.5,94.283 60,94.283
  other v3: 91.821,61.595 32.918,78.181 36.246,78.181 34.5,79.5 32.918,80.848 36.246,80.848 95.25,85.598
IOREF: J3.29 U7.12 | length 64
  Top Layer w0.4: U7.12 17.415,76.057 19.932,73.54 29.736,73.54 39.599,63.678 54.347,63.678 55.48,62.544 68.088,62.544 69.952,60.681 69.952,59.565 J3.29
LED: L2.2 U1.7 | length 24.9
  Top Layer w0.4: L2.2 64.03,83.02 80.226,83.02 81.42,81.826 U1.7
NetJ2_2: J2.2 P1.1 | length 18.8
  Top Layer w0.4: P1.1 22.617,88 25.705,84.912 33.96,84.912 35.064,86.017 35.064,87.936 J2.2
NetL1_1: L1.1 R3.1 | length 2.3
  Top Layer w0.4: L1.1 R3.1
NetL2_1: L2.1 R7.1 | length 2.3
  Top Layer w0.4: L2.1 R7.1
NetR4_2: R4.2 R5.1 U1.29 | length 6.4
  Top Layer w0.4: R5.1 86.436,61.595 ; U1.29 86.5,61.659 86.436,61.595 ; R4.2 86.436,61.595
NetR5_2: R5.2 U1.28 | length 3.7
  Top Layer w0.4: R5.2 U1.28
NetR6_1: R6.1 U4.3 | length 3.4
  Top Layer w0.4: U4.3 92.407,92 92.641,91.766 92.641,91.59 92.791,91.44 R6.1
NetU5_44: U5.44 U6.3 | length 30
  Top Layer w0.4: v1(21.082,43.002) 21.102,42.982 23.885,42.982 U5.44
  Int2 (Signal) w0.4: v1@21.105,43.002 21.105,36.036 20.661,35.593 20.661,30.215 21.345,29.532 21.345,19.524 22.454,18.415 U6.3
NetU6_44: U6.44 U7.3 | length 68.2
  Int2 (Signal) w0.4: U7.3 23.74,76.175 27.864,76.175 28.931,75.108 28.931,19.771 U6.44
P1: J1.1 U5.15 U5.31 U6.15 U7.15 | length 128.5
  Top Layer w0.4: U6.15 12.335,28.753 ; U5.31@12.335,36.81 U5.31 12.335,28.753 ; v1(45.009,26.822) 44.577,26.822 42.494,28.905 12.487,28.905 12.335,28.753 ; J1.1@47.76,44.348 J1.1@57.285,44.348
  Int2 (Signal) w0.4: v1(45.009,26.822) 45.009,42.977 46.38,44.348 47.76,44.348 J1.1@47.947,44.161
  Bottom Layer w0.4: U5.31 13.462,37.64 13.462,38.553 13.485,38.576 13.485,53.142 U5.15 11.951,54.292 6.045,60.198 6.045,80.427 7.019,81.4 11.185,81.4 U7.15
P2: J1.2 U5.16 U5.32 U6.16 U7.16 | length 128.1
  Top Layer w0.4: v1(4.413,81.4) 10.945,81.4 U7.16 ; U6.16 11.125,24.705 11.125,37.843 U5.32 ; v1(22.276,34.366) 22.581,34.061 39.802,34.061 47.548,41.808 47.76,41.808 J1.2@57.285,41.808
  Bottom Layer w0.4: v1(4.413,81.4) 4.413,57.95 4.394,57.932 9.423,52.903 11.185,52.903 U5.16 U5.32 ; U6.16 13.63,24.79 17.797,24.79 18.644,25.637 18.644,26.949 19.634,27.94 20.726,27.94 22.276,29.489 v1(22.276,34.366)
P3: J1.3 U5.17 U5.33 U6.17 U7.17 | length 114.6
  Top Layer w0.4: v1(16.053,45.568) 16.053,37.269 15.64,36.857 15.517,36.857 15.173,36.512 U5.33 15.085,36.302 15.085,35.715 16.51,34.29 20.803,34.29 21.793,33.299 41.427,33.299 47.396,39.268 47.76,39.268 J1.3@57.285,39.268
  Int2 (Signal) w0.4: U6.17 9.795,27.575 14.808,32.588 14.808,36.446 U5.33 ; U5.17 10.945,53.142 10.945,50.929 16.053,45.822 v1(16.053,45.568) ; J1.3@47.53,39.038 J1.3@47.76,39.268
  Bottom Layer w0.4: U5.17 9.497,54.292 5.182,58.608 5.182,81.001 6.731,82.55 U7.17
P4: J1.4 U5.18 U5.34 U6.18 U7.18 | length 123.1
  Top Layer w0.4: v1(2.718,79.858) 6.899,79.858 7.001,79.756 U7.18 ; U5.34 13.665,37.843 13.665,34.95 14.986,33.63 20.269,33.63 21.199,32.699 43.19,32.699 47.218,36.728 47.76,36.728 J1.4@57.285,36.728
  Int2 (Signal) w0.4: U6.18 7.255,26.483 13.614,32.842 13.614,39.091 ; v2(11.201,40.488) 11.214,40.5 12.903,40.5 13.614,39.789 13.614,39.091 ; U5.34 13.652,39.052 13.614,39.091 ; J1.4@47.53,36.958 J1.4@47.76,36.728
  Bottom Layer w0.4: v1(2.718,79.858) 2.718,56.591 7.255,52.054 U5.18 8.436,50.571 10.592,50.571 11.252,49.911 v2@11.252,40.488 ; U7.18@7.128,80.137 U7.18
P5: J1.5 U5.19 U5.35 U6.19 U7.19 | length 117.2
  Top Layer w0.4: v1(3.581,78.816) 3.62,78.854 8.639,78.854 U7.19 ; U5.19 U5.19@9.795,51.927 ; v1(17.323,43.409) 18.565,42.166 18.565,37.793 17.415,36.643 U5.35 ; v1(17.415,32.69) 17.469,32.69 18.104,32.055 44.298,32.055 46.431,34.188 47.76,34.188 J1.5@57.285,34.188
  Int2 (Signal) w0.4: U6.19 11.135,24.835 11.135,27.619 17.348,33.832 17.348,36.446 U5.35 ; U5.19 9.795,51.455 10.345,50.905 10.345,50.289 10.945,49.689 10.945,49.685 17.222,43.409 v1(17.323,43.409)
  Bottom Layer w0.4: v1(3.581,78.816) 3.581,57.201 9.03,51.752 U5.19 ; v1@17.415,32.88 U5.35
P6: J1.6 U5.20 U5.36 U6.20 U7.20 | length 136
  Top Layer w0.4: v1(16.281,31.09) 20.956,31.09 21.071,31.205 44.871,31.205 45.313,31.648 47.76,31.648 J1.6@57.285,31.648
  Int2 (Signal) w0.4: v2(1.524,20.955) 1.587,21.018 1.587,41.885 3.175,43.473 v2(3.175,49.327) 3.175,75.184 5.461,77.47 U7.20 ; U6.20 7.544,20.955 8.694,22.105 12.986,22.105 13.589,22.708 13.589,28.397 v1(16.281,31.09)
  Bottom Layer w0.4: v2(1.524,20.955) U6.20 ; v2(3.175,49.327) 7.141,49.327 U5.20 ; v1(16.281,31.09) 16.265,31.106 16.265,37.902 U5.36
P7: J1.7 U5.21 U5.37 U6.21 U7.21 | length 143.2
  Top Layer w0.4: v1(21.361,30.505) 44.806,30.505 46.203,29.108 47.76,29.108 J1.7@57.285,29.108
  Int2 (Signal) w0.4: v2(2.337,19.507) 2.337,40.523 3.886,42.072 v2(3.886,48.412) 3.886,74.524 5.588,76.225 8.484,76.225 9.728,77.47 U7.21 ; U6.21 14.275,20.955 16.078,22.758 16.078,28.981 19.787,32.69 19.787,36.344 U5.37 ; J1.7@47.435,29.108 J1.7@47.76,29.108
  Bottom Layer w0.4: v2(2.337,19.507) 2.445,19.615 8.455,19.615 U6.21 ; v2(3.886,48.412) 6.009,48.412 6.365,48.057 8.639,48.057 U5.21 ; U5.37 21.361,35.106 v1(21.361,30.505)
P8: J1.8 U5.22 U5.38 U6.22 U7.22 | length 131.5
  Top Layer w0.4: v1(19.837,29.642) 43.637,29.642 46.658,26.621 47.707,26.621 47.76,26.568 J1.8@57.285,26.568 ; U5.38 U5.38@20.226,39.052
  Int2 (Signal) w0.4: v2(3.15,18.44) 3.15,40.183 4.597,41.631 4.597,47.346 v2(4.631,47.379) 4.631,73.871 5.69,74.93 U7.22 ; U5.22 7.255,46.491 8.407,45.339 13.35,45.339 19.637,39.052 U5.38 ; J1.8@47.76,26.568 J1.8@47.76,26.608
  Bottom Layer w0.4: v2(3.15,18.44) 3.159,18.45 U6.22@7.255,18.45 ; v2(4.631,47.379) v2@4.685,47.379 ; v2@4.631,47.458 4.631,47.433 v2@4.685,47.379 ; U5.22 7.177,46.672 6.471,47.379 v2@4.685,47.379 ; v1(19.837,29.642) 19.837,30.81 18.805,31.843 18.805,37.902 U5.38
P9: J1.9 U5.14 U5.23 U6.23 U7.23 | length 165.1
  Top Layer w0.4: U5.23 10.325,46.672 14.875,51.222 U5.14 ; v1(27.203,55.104) 30.392,55.104 34.798,50.698 64.584,50.698 68.478,46.804 68.478,45.104 69.234,44.348 75.285,44.348 J1.9@84.59,44.348
  Int2 (Signal) w0.4: v2(4.267,17.043) 4.267,38.379 5.331,39.443 v2(5.331,46.33) 5.331,72.615 6.305,73.59 7.734,73.59 8.883,74.739 9.604,74.739 U7.23
  Bottom Layer w0.4: v2(4.267,17.043) 4.299,17.075 8.455,17.075 U6.23 ; v2(5.331,46.33) 6.188,45.472 8.595,45.472 U5.23 ; U5.14 14.732,51.61 14.732,50.546 17.348,47.93 26.518,47.93 27.61,49.022 27.61,54.698 v1(27.203,55.104)
P10: J1.10 U5.13 U5.24 U6.24 U7.24 | length 151.3
  Top Layer w0.4: U5.24 7.255,44.403 7.674,44.822 7.674,44.835 8.56,45.72 8.56,47.134 9.298,47.873 10.152,47.873 13.675,51.395 13.675,53.092 U5.13 16.285,55.702 25.07,55.702 26.416,54.356 29.763,54.356 34.157,49.962 64.472,49.962 67.71,46.724 67.71,42.246 67.944,42.012 75.081,42.012 75.285,41.808 J1.10@84.59,41.808
  Int2 (Signal) w0.4: U6.24 6.015,17.115 6.015,44.133 ; U5.24 6.015,44.133 ; U7.24 6.031,71.166 6.031,46.04 6.015,46.024 6.015,44.133
P11: J1.11 U5.12 U5.25 U6.25 U7.25 | length 169.9
  Top Layer w0.4: v1(1.575,14.554) 1.6,14.58 v1(1.6,46.507) 1.6,66.472 6.178,71.05 8.455,71.05 U7.25 ; U5.25@10.024,44.107 10.04,44.107 10.066,44.133 10.935,44.133 17.424,50.622 17.415,50.631 U5.12 18.672,53.01 29.896,53.01 33.795,49.111 64.474,49.111 66.98,46.605 66.98,40.361 67.613,39.728 74.825,39.728 75.285,39.268 J1.11@84.59,39.268
  Bottom Layer w0.4: v1(1.575,14.554) 1.594,14.535 1.683,14.535 8.455,14.535 U6.25 ; v1(1.6,46.507) 2.718,46.507 6.426,42.799 8.509,42.799 9.795,44.085 U5.25
P12: J1.12 U5.11 U5.26 U6.26 U7.26 | length 173.1
  Top Layer w0.4: v1(2.286,13.259) 2.286,13.286 2.345,13.345 2.345,65.693 6.35,69.698 7.103,69.698 U7.26 ; U5.26 8.595,42.932 8.595,44.63 9.284,45.319 9.284,45.333 10.458,45.333 16.215,51.089 16.215,53.092 U5.11 ; v1(26.873,52.197) 29.185,52.197 33.02,48.362 64.375,48.362 66.294,46.442 66.294,37.44 67.006,36.728 75.285,36.728 J1.12@84.59,36.728
  Bottom Layer w0.4: v1(2.286,13.259) 2.305,13.278 2.661,13.278 2.718,13.335 U6.26 ; v1(2.388,44.679) 2.426,44.64 3.11,44.64 6.152,41.598 7.249,41.598 U5.26 ; 4.42,13.37 U6.26@7.255,13.37 ; U5.11 18.669,53.038 18.669,51.412 19.479,50.602 26.015,50.602 26.835,51.422 26.835,52.159 v1(26.873,52.197)
P13: J1.13 U5.10 U5.27 U6.27 U7.27 | length 169.6
  Top Layer w0.4: v1(3.175,11.913) 3.194,11.932 3.194,12.002 3.223,12.031 3.223,38.243 3.229,40.386 3.235,42.392 3.236,42.901 3.299,64.735 3.299,65.224 6.585,68.51 8.455,68.51 U7.27 ; U5.27 U5.10 21.105,50.602 29.103,50.602 32.093,47.612 64.276,47.612 65.611,46.276 65.611,35.328 66.752,34.188 75.285,34.188 J1.13@84.59,34.188
  Bottom Layer w0.4: v1(3.175,11.913) 3.454,11.913 3.537,11.995 8.455,11.995 U6.27 ; v1(3.175,42.393) 5.175,40.392 8.287,40.392 9.08,41.186 9.118,41.186 9.524,41.593 U5.27
P14: J1.14 U5.9 U5.28 U6.28 U7.28 | length 171.8
  Top Layer w0.4: v1(4.14,10.897) 4.121,10.916 4.121,10.986 4.101,11.007 4.101,37.879 4.104,39.09 4.106,39.878 4.108,40.411 4.178,64.63 6.858,67.31 U7.28 ; v1(19.304,49.327) 20.568,48.062 30.297,48.062 31.496,46.863 64.176,46.863 64.862,46.177 64.862,34.147 67.361,31.648 75.285,31.648 J1.14@84.59,31.648
  Int2 (Signal) w0.4: v1(19.304,49.327) 18.771,49.86 18.771,53.108 U5.9
  Bottom Layer w0.4: v1(4.031,39.878) 4.856,39.052 U5.28 ; v1@4.293,10.795 U6.28 ; U7.28 7.255,60.563 11.811,56.007 18.24,56.007 U5.9
P15: J1.15 U5.8 U5.29 U6.29 U7.29 | length 189.4
  Top Layer w0.4: 6.02,36.512 U5.29 ; U6.29 6.934,8.255 5.932,9.258 5.932,63.64 7.214,64.922 9.643,64.922 U7.29 ; v1(17.399,27.305) 29.932,27.305 34.707,22.53 83.972,22.53 86.716,25.273 86.716,28.245 85.853,29.108 84.59,29.108 J1.15@75.285,29.108
  Bottom Layer w0.4: U5.29 9.795,33.715 16.205,27.305 v1(17.399,27.305) ; U7.29 9.795,59.826 12.548,57.074 19.202,57.074 21.295,54.981 21.295,52.953 U5.8 ; J1.15@84.55,29.068 J1.15@84.59,29.108
P16: J1.16 U5.7 U5.30 U6.30 U7.30 | length 179.8
  Top Layer w0.4: v1(4.978,9.119) 4.978,9.146 5.029,9.196 v1(5.029,37.465) 5.029,63.983 6.883,65.837 8.322,65.837 U7.30 ; U6.30@9.795,10.76 U6.30 ; v1(17.374,28.118) 29.967,28.118 34.844,23.241 66.827,23.241 69.039,25.452 69.039,26.018 69.589,26.568 75.285,26.568 J1.16@84.59,26.568
  Bottom Layer w0.4: v1(4.978,9.119) 8.119,9.119 U6.30 ; v1(5.029,37.465) 8.207,37.465 U5.30 ; U7.30 11.049,66.056 11.049,60.147 13.284,57.912 19.943,57.912 22.285,55.57 22.285,54.503 U5.7 ; U5.30@9.824,39.132 10.046,39.052 11.125,37.973 11.125,33.604 16.612,28.118 v1(17.374,28.118)
PCLK: U1.21 U5.1 U6.1 U7.1 | length 106.9
  Top Layer w0.4: U7.1 23.74,71.145 31.09,71.145 37.617,64.618 v1(37.617,64.592) ; v1(56.617,64.211) 57.023,63.805 65.1,63.805 66.18,64.885 U1.21
  Int2 (Signal) w0.4: U6.1 23.774,17.154 23.774,44.133 ; U5.1 23.774,44.133 ; U7.1 23.774,71.111 23.774,44.133 ; v1(37.617,64.592) 37.998,64.211 v1(56.617,64.211)
PWM: U1.19 U7.9 | length 50.9
  Top Layer w0.4: U7.9 19.955,82.356 21.234,81.077 21.234,79.375 21.965,78.644 27.5,78.644 37.844,68.301 60.985,68.301 61.486,67.8 U1.19
RX: R2.1 U1.2 U4.1 | length 14.2
  Top Layer w0.4: R2.1 84.661,86.644 85.568,86.644 86.492,85.72 90.251,85.72 ; U4.1 90.136,86.824 90.136,85.836 90.251,85.72 ; U1.2 94.082,80.538 94.082,81.89 90.251,85.72
SCLK: U1.22 U5.2 U6.2 U7.2 | length 114.2
  Top Layer w0.4: U7.2 29.235,74.93 39.751,64.414 54.585,64.414 55.855,63.144 67.97,63.144 68.72,63.894 U1.22
  Int2 (Signal) w0.4: U6.2 28.245,21.625 28.245,46.584 ; U5.2 25.124,46.584 28.245,46.584 ; U7.2 27.61,74.93 28.245,74.295 28.245,46.584
SIN: U1.23 U5.3 | length 66.4
  Top Layer w0.4: U5.3 22.495,46.314 23.343,45.466 v1(35.204,45.466) ; v1(35.484,51.41) 66.624,51.41 71.26,56.045 U1.23
  Int2 (Signal) w0.4: v1(35.204,45.466) 35.204,51.076 35.484,51.355 v1(35.484,51.41)
TX: R1.1 U1.3 U4.5 | length 24.6
  Top Layer w0.4: v1(84.379,84.303) 84.404,84.328 89.713,84.328 91.58,82.461 U1.3 ; R1.1 86.666,94 87.206,94.54 U4.5
  Int2 (Signal) w0.4: v1(84.379,84.303) 84.379,91.419 U4.5
VIN: J3.23 U7.37 | length 38.3
  Top Layer w0.4: U7.37 19.955,62.874 21.996,60.833 53.797,60.833 54.367,60.263 54.367,60.206 54.745,59.829 J3.23
WIFI_RESET: R6.2 U1.8 | length 25.7
  Top Layer w0.4: R6.2 93.117,89.916 v1(94.615,89.916)
  Int2 (Signal) w0.4: U1.8 78.88,82.258 79.502,82.88 93.472,82.88 94.296,83.704 94.296,89.597 v1(94.615,89.916)
pads on no net: J2. J2.3 J3. MH1.1 MH2.1 MH3.1 U1.4 U1.5 U1.6 U1.9 U1.10 U1.11 U1.12 U1.13 U1.15 U1.16 U1.18 U1.24 U1.25 U1.26 U1.27 U1.30 U1.31 U1.34 U1.35 U1.36 U1.37 U4.6 U4.7 U5.5 U5.6 U5.39 U5.40 U6.5 U6.6 U6.39 U6.40 U7.5 U7.6 U7.39 U7.40 U7.44

## Polygon pours and split planes (outlines as drawn)
GND on Top Layer (solid, pour order 16): 92.329,86.36 95.377,86.36 97.79,83.947 97.79,79.248 95.504,79.248 95.504,81.915 92.329,85.09
GND on Top Layer (solid, pour order 14): 89.408,62.484 90.932,62.484 92.964,64.516 92.964,66.294 95.377,66.294 95.377,60.681 89.408,60.681
GND on Top Layer (solid, pour order 12): 30.353,13.879 27.584,13.879 27.584,10.73 30.353,10.73
GND on Top Layer (solid, pour order 10): 28.702,39.572 32.004,39.572 32.004,36.422 28.702,36.422
GND on Top Layer (solid, pour order 8): 28.702,68.072 32.004,68.072 32.004,64.922 28.702,64.922
GND on Top Layer (solid, pour order 4): 51.537,89.319 51.537,94.92 51.511,94.945 60.706,94.945 60.731,94.971 60.731,92.024 55.844,92.024 54.915,91.095 54.915,89.344
+3.3V on Top Layer (solid, pour order 2): 92.977,88.43 93.815,88.43 93.802,88.417 93.802,87.02 91.567,87.02 90.373,88.214 85.776,88.214 85.293,87.732 81.966,87.732 81.94,93.091 81.966,93.066 86.258,93.066 86.258,90.78 90.627,90.78
+3.3V on Top Layer (solid, pour order 0): 45.207,88.189 58.801,88.189 58.852,88.138 58.852,79.426 54.813,79.426 54.813,76.606 45.132,76.606
+3.3V on Bottom Layer (solid, pour order 20): 98.044,63.525 95.504,63.525 95.504,73.64 95.504,75.819 98.044,78.854 98.044,81.26 96.119,83.185 53.975,83.185 53.975,86.614 56.821,89.46 77.395,89.46 78.54,90.605 81.661,93.726 84.455,96.52 91.44,96.52 99.314,88.646 99.314,63.525
no net on Bottom Layer (solid, pour order 18): 54.61,86.36
GND on Int1 (GND) (split plane): 100.09,0.51 0.51,0.51 0.51,99.49 100.09,99.49

## Text inside footprints (layer, text, board x,y; h text height)
J1: Top Overlay "9" at 85.86,43.914 h1; Top Overlay "10" at 85.86,41.372 h1; Top Overlay "11" at 85.86,38.831 h1; Top Overlay "12" at 85.86,36.289 h1; Top Overlay "13" at 85.86,33.747 h1; Top Overlay "16" at 85.86,26.122 h1; Top Overlay "15" at 85.86,28.663 h1; Top Overlay "14" at 85.86,31.205 h1; Top Overlay "7" at 45.799,28.665 h1; Top Overlay "8" at 45.799,26.123 h1; Top Overlay "6" at 45.799,31.207 h1; Top Overlay "5" at 45.799,33.749 h1; Top Overlay "4" at 45.799,36.291 h1; Top Overlay "3" at 45.799,38.832 h1; Top Overlay "2" at 45.799,41.374 h1; Top Overlay "1" at 46.132,43.916 h1